# Altium PCB HU_revB.PcbDoc (part 3 of 5)
Units mm, origin at the board's own origin, x right, y up, seen from the top; angles counter-clockwise.
Board outline 164 x 90 mm, 6 copper layers (TOP, GND1, INT SIG, PWR + INT SIG, GND2, BOT), stack 1.538 mm thick; 404 components, 380 nets, 1687 pads, 342 vias.
Unrouted connection lines stored in the file: 70.
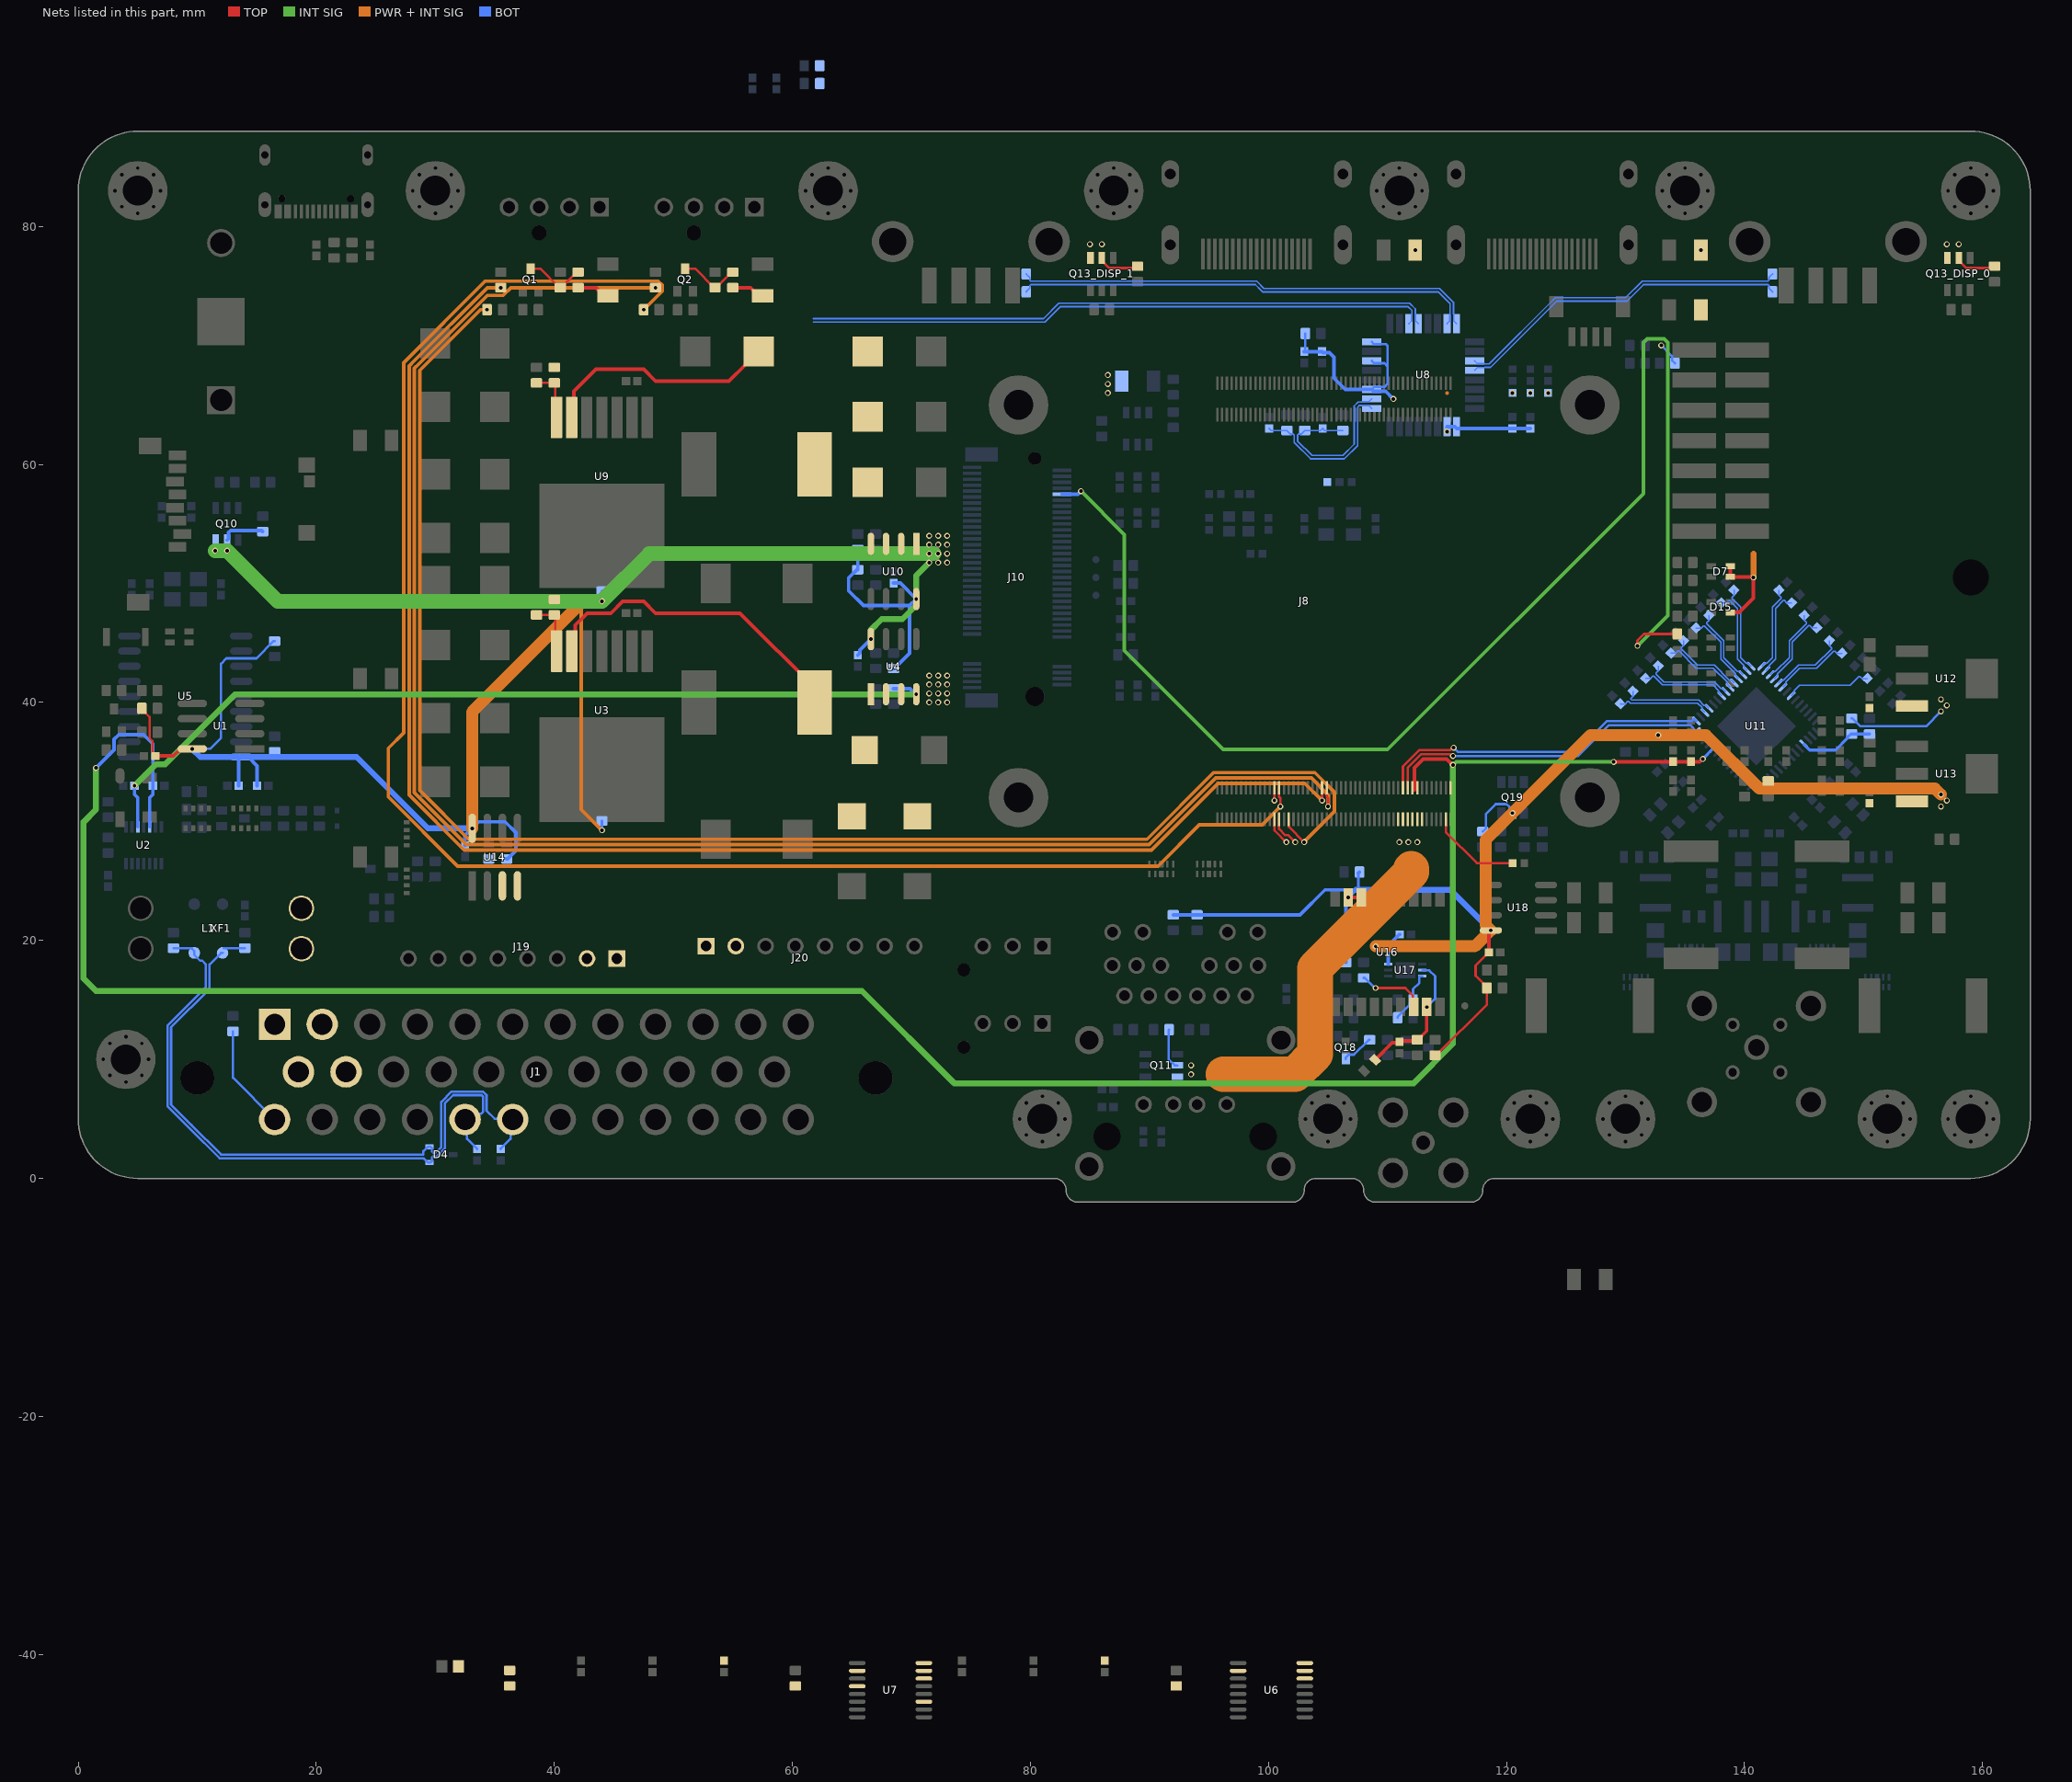
[diagram p6: the nets of this part, all layers, seen from the top]

## Via types
v1: diameter 0.5, hole 0.3, TOP to BOT, 322 vias
v2: diameter 0.5, hole 0.2, TOP to BOT, 16 vias
v3: diameter 0.75, hole 0.5, TOP to BOT, 4 vias

## Nets (pads, with @x,y where several pads share a name; then routed paths per layer and width w, separated by ;. In a path a pad name is that pad's centre, name@x,y a point inside that pad or via, vN(x,y) a via of type N, cw(c..) or ccw(c..) an arc to the next point about the centre after c; other vN are vias at no path point) (continued)
3V3_AUX: (continued)
  BOT w0.2: v1(9.584,36.095) 11.095,36.095 12,37 12,43.25 12.45,43.7 14.975,43.7 16.425,45.15 R54.1@16.5,45.15 ; v1(44,29.25) R28.1@44,30.05 ; v1(44,48.5) R84.1@44,49.35 ; C52.1@103,69.479 103.1,69.579 R137.2@103.1,71 ; 107.35,24.25 107.55,24.45 R27.2@107.55,25.65 ; U8.3@108.675,66.3 108.875,66.5 109.75,66.5 110,66.75 110,68.25 ; U8.6@108.675,68.7 108.875,68.5 109.75,68.5 110,68.25 ; U8.8@108.675,70.3 108.875,70.1 109.883,70.1 110,69.983 110,68.25 ; R131.1@118,29.15 118.275,29.425 118.275,30.629 119.096,31.45 120.004,31.45 120.25,31.204 120.25,30.95 v1(120.5,30.7) ; R96.2@131.5,37.15 131.6,37.25 v1(132.75,37.25) ; R97.2@149,38.65 149.075,38.65 149.725,38 155.25,38 v1(156.5,39.25)
  BOT w0.3: Q10.5@12.5,53.65 12.625,53.775 12.625,54.274 12.801,54.45 15.4,54.45 R59.2@15.5,54.35 ; C29.1@13.479,33 13.479,35.281 U5.18@13.617,35.42 ; U5.18@14.269,35.42 15.021,34.667 C30.1@15.021,33 ; C104.1@32.5,27.979 32.5,28.821 v1(33.095,29.416) 33.645,29.966 35.863,29.966 36.775,29.054 36.775,27.55 36.075,26.85 R108.2@36,26.85 ; C10.1@65.5,43.979 65.686,44.165 65.686,44.407 v1(66.595,45.316) ; R90.2@65.5,52.85 R89.2@65.5,51.15 65.425,51.15 64.725,50.45 64.725,49.384 65.975,48.134 69.855,48.134 ; R33.2@68.5,42.85 68.575,42.85 69.855,44.13 69.855,48.134 ; C60.1@68.5,50.021 69.067,50.021 v1(70.405,48.684) 69.855,48.134 ; R8.1@92,22.15 R9.1@94,22.15 102.65,22.15 104.75,24.25 107.35,24.25 v1(106.7,23.6) 106.7,23.546 106.521,23.367 C106.1@106.521,21.5 C107.1@106.521,20 106.511,19.989 106.511,18.161 R116.1@106.5,18.15 ; C52.1@103,69.479 C53.1@104.5,69.479 ; C53.1@104.5,69.457 104.568,69.39 105.11,69.39 105.5,69 105.5,67.25 106.45,66.3 U8.3@108.675,66.3 108.825,66.15 109.85,66.15 v1(110.5,65.5) ; R27.2@107.55,25.65 R27.2@107.65,25.75 ; v1(109,19.5) 110,19.5 110.075,19.575 ; U17.6@110.075,18 110.075,19.575 ; C109.1@111.021,20.5 111,20.5 110.075,19.575 ; v1(115,62.75) 115,63 U8.26@115,63.175 115.65,63.175 115.8,63.025 115.8,63.021 C55.1@120.5,63.021 C54.1@122,63.021
  BOT w0.5: v1(9.584,36.095) 10.259,35.42 U5.18@13.479,35.42 ; U5.18@13.7,35.42 14.269,35.42 23.38,35.42 29.384,29.416 v1(33.095,29.416) ; 107.35,24.25 115.279,24.25 v1(118.684,20.845)
  other v1: 156.5,31.25 157,31.75 157,39.75 156.5,40.25 72.25,51.75 73,51.75 72.25,52.5 73,52.5 71.5,53.25 72.25,53.25 73,53.25 71.5,54 72.25,54 73,54 86.5,66 120.5,66 122,66 123.5,66 86.5,66.75 86.5,67.5
3V3_EN: R85.2
3V3_MAIN: C4.1 C96.2 C97.2 J8.84 J8.86 U2.5 U11.24 | length 203.6
  TOP w0.3: 112.25,32.657 112.25,34.5 113,35.25 114.974,35.25 115.474,34.75 v1(115.5,34.75) ; v1(129,35) 129.011,35.011 133.989,35.011 C96.2@134,35.021 C97.2@135.5,35.021 136.232,35.021 136.46,35.25 v1(136.5,35.25)
  INT SIG w0.3: v1(115.5,34.75) 115.526,34.75 115.776,35 v1(129,35)
  INT SIG w0.5: v1(1.5,34.5) 1.5,31 0.45,29.95 0.45,16.8 1.5,15.75 65.85,15.75 73.6,8 112.2,8 115.5,11.3 v1(115.5,34.75)
  BOT w0.25: v1@136.5,35.268 U11.24@137.376,36.144
  BOT w0.3: v1(1.5,34.5) 3,36 3,36.889 3.411,37.3 5.5,37.3 6.271,36.529 C4.1@6.271,33 6.271,32.271 6,32 U2.5@6,29.543
3V3_REG_EN: R85.1 R86.2 U9.7 | length 4.5
  TOP w0.2: R86.2@38.5,66.85 R85.1@40,66.85 40.071,66.779 40.071,64.069 U9.7@40.19,63.95
3V3_REG_FB: C66.1 C67.1 C68.1 C69.1 L3.2 U9.6 U10.3 U10.4 | length 20
  TOP w0.3: U9.6@41.46,63.95 41.65,64.14 41.65,66.15 43.5,68 47.5,68 48.5,67 54.672,67 56.042,68.37 56.042,68.4 57.142,69.5 C68.1@57.172,69.5
5V_MAIN: C3.1 F1.2 F2.2 F4.2 F11_DISP_0.1 F11_DISP_1.1 J8.77 J8.79 J8.81 J8.83 J8.85 J8.87 Q11.5 Q11.6 Q13_DISP_0.5 Q13_DISP_0.6 Q13_DISP_1.5 Q13_DISP_1.6 R1.1 R2.1 R5.1 R34.2 R62.2 R65_DISP_0.2 R65_DISP_1.2 U2.3 U4.3 U4.4 | length 119.9
  TOP w0.2: Q13_DISP_1.5@86,77.35 86,77.125 86.625,76.5 88.85,76.5 R65_DISP_1.2@89,76.65 ; Q13_DISP_0.5@158,77.35 158,77.125 158.625,76.5 160.85,76.5 R65_DISP_0.2@161,76.65
  TOP w0.3: R2.1@42,74.85 43.5,74.85 44.18,74.17 F2.2@44.5,74.17 ; R5.1@55,74.85 56.5,74.85 57.18,74.17 F4.2@57.5,74.17
  INT SIG w0.5: v1(4.729,33) 6.529,34.8 7.3,34.8 13.184,40.684 v1(70.405,40.684)
  PWR + INT SIG w3: 96.216,8.75 102.226,8.75 103.915,10.439 103.915,17.665 112,25.75 112,26
  BOT w0.2: R62.2@91.65,12.5 91.6,12.45 91.6,10.025 92.125,9.5 Q11.5@92.35,9.5 ; v1(133,70) 133.905,69.095 133.905,68.745 R1.1@134.15,68.5
  BOT w0.3: v1(4.729,33) 4.729,32.271 5,32 U2.3@5,29.543 ; R34.2@68.5,41.15 69.885,41.15 70.351,40.684 v1(70.405,40.684)
  other v1: 93.5,8.75 93.5,9.5 111,28.25 111.75,28.25 112.5,28.25 71.5,40 72.25,40 73,40 71.5,40.75 72.25,40.75 73,40.75 71.5,41.5 72.25,41.5 73,41.5 71.5,42.25 72.25,42.25 73,42.25 112.33,78 136.33,78 85,78.5 86,78.5 157,78.5 158,78.5
5V_REG_EN: R29.1 R30.2 U3.7 | length 4.6
  TOP w0.2: R30.2@38.5,47.35 R29.1@40,47.35 40.071,47.279 40.071,44.419 U3.7@40.19,44.3
5V_REG_FB: C16.1 C17.1 C18.1 L2.2 U3.6 U4.1 U4.2 | length 27.6
  TOP w0.3: U3.6@41.46,44.3 41.75,44.59 41.75,46.5 42.75,47.5 44.75,47.5 45.75,48.5 47.5,48.5 48.5,47.5 55.6,47.5 62,41.1 L2.2@62,40
ACC_12V: J1.24 R22.1 | length 8.8
  BOT w0.2: R22.1@13,12.35 13,8.45 J1.24@16.5,4.95
ACT_LED: J10.10 R44.2 | length 118.1
  TOP w0.2: v1(131,44.75) 131,45.2 131.55,45.75 R44.2@134.35,45.75
  INT SIG w0.3: v1(84.25,57.75) 87.9,54.1 87.9,44.35 96.2,36.05 110.004,36.05 131.5,57.546 131.5,70.228 131.822,70.55 133.228,70.55 133.55,70.228 133.55,47.3 v1(131,44.75)
  BOT w0.3: J10.10@82.65,57.5 83.974,57.5 84.224,57.75 v1(84.25,57.75)
ADC_MISO: J8.26 U6.15 U7.15 | length 1.1
  TOP w0.2: v1(100.5,31.75) J8.26@100.5,32.82
ADC_MOSI: J8.27 U6.14 U7.14 | length 2.6
  TOP w0.2: J8.27@100.9,30.18 100.9,29.35 101.412,28.838 101.662,28.838 v1(102.25,28.25)
ADC_SCLK: J8.25 U6.16 U7.16 | length 2.3
  TOP w0.2: J8.25@100.5,30.18 100.5,29.25 v1(101.5,28.25)
AMBIENT_TEMP: R57.2 R58.2 U7.11
AMP_I_SENSE: R107.1 U7.4
AMP_VCC: J19.1 J19.2 J20.1 J20.2 U14.3 U14.4
ANT_DETECT: R125.2 U16.16 | length 5.7
  TOP w0.2: v1(109,16) 111.5,16 112.142,15.358 112.142,14.458 U16.16@112.2,14.4
  BOT w0.2: R125.2@108,16.85 108.075,16.85 108.925,16 v1(109,16)
ANT_PWR_GATE: Q18.3 R117.2 | length 2.7
  BOT w0.2: Q18.3@106.5,10.05 106.5,10.15 106.75,10.4 107.175,10.4 108.425,11.65 R117.2@108.5,11.65
ANT_SENSE: R120.2 R121.1 U17.3 | length 4.5
  BOT w0.2: R120.2@110.85,13.5 110.85,13.575 111.85,14.575 111.85,14.7 R121.1@112.15,15 112.15,15.913 112.675,16.438 112.675,16.975 112.7,17 U17.3@112.925,17
ANT_SHORT_N: C108.1 L16.1 R119.2 U16.17 U17.2 | length 11.5
  TOP w0.261: R119.2@112.575,11.65 113.3,12.375 v1(113.3,14.4)
  TOP w0.3: L16.1@108.968,9.968 110.389,11.389 110.911,11.389 111.086,11.564 112.414,11.564 R119.2@112.5,11.65
  BOT w0.2: U17.2@112.925,17.5 112.941,17.484 113.516,17.484 114,17 114,15.1 v1(113.3,14.4)
BAT_12V: J1.1 J1.2 J1.13 J1.14 XF1.1 XF1.2
CAM_GPIO0: J8.97 R145.1 | length 7.8
  TOP w0.2: J8.97@114.9,30.18 114.9,29.1 117.5,26.5 R145.1@120.5,26.5
CAM_GPIO1: J8.100
CAN_INH: R29.2
CAN_N: C6.1 D4.2 J1.29 L1.4 R21.2 | length 56.6
  BOT w0.2: L1.4@12.125,18.95 11.993,18.95 11.026,17.983 11.026,15.938 7.802,12.714 7.802,6.198 9.5,4.5 12,2 29,2 29,2.29 29.36,2.65 D4.2@29.5,2.65 29.608,2.65 29.718,2.54 29.718,2.268 29.836,2.151 30.001,2.151 30.5,2.65 30.5,6.427 31.375,7.302 34.008,7.302 34.302,7.008 34.302,5.698 34.992,5.008 36.442,5.008 J1.29@36.5,4.95 36.325,4.775 36.325,3.325 35.5,2.5 C6.1@35.5,2.479 ; L1.4@12.21,19.35 R21.2@14,19.35
CAN_P: C8.2 D4.1 J1.28 L1.1 R24.1 | length 55.9
  BOT w0.2: R24.1@8,19.35 9.5,19.35 9.75,19.1 9.75,18.794 10.245,18.298 10.409,18.298 10.724,17.983 10.724,16.063 7.5,12.839 7.5,6.073 9.379,4.195 11.875,1.698 29,1.698 29.048,1.65 29.06,1.65 29.36,1.35 D4.1@29.5,1.35 29.608,1.35 29.718,1.46 29.718,1.732 29.836,1.849 30.126,1.849 30.802,2.525 30.802,6.302 31.5,7 33.883,7 34,6.883 34,5.582 33.836,5.419 32.969,5.419 J1.28@32.5,4.95 32.675,4.775 32.675,3.325 33.5,2.5 C8.2@33.5,2.479
CFG0: R97.1 R99.2 U11.4 | length 6.3
  BOT w0.25: U11.4@144.977,36.497 145.475,36 147.65,36 148.65,37 148.65,37.075 148.925,37.35 R97.1@149,37.35 R99.2@150.5,37.35
CH0_FAN_PWM: Q1.3 R2.2 R135.2 | length 5.2
  TOP w0.2: Q1.3@38,76.45 38.825,76.45 40.425,74.85 R135.2@40.5,74.85 40.575,74.85 41.575,75.85 41.7,75.85 R2.2@42,76.15
CH0_FAN_TACH: J8.46 R47.2 | length 129.1
  TOP w0.2: v1(104.5,31.75) J8.46@104.5,32.82
  PWR + INT SIG w0.3: v1(35.5,74.85) 34.377,74.85 28.2,68.673 27.8,68.273 27.8,32.637 27.8,32.227 32.427,27.6 32.837,27.6 90.168,27.6 95.768,33.2 103.05,33.2 v1(104.5,31.75)
CH0_GPIO: J8.31 R3.1 | length 132.3
  TOP w0.2: J8.31@101.7,30.18 101.7,29.55 v1(103,28.25)
  PWR + INT SIG w0.3: v1(34.35,73) 33.8,73 28.7,67.9 28.7,32.6 32.8,28.5 89.795,28.5 95.395,34.1 103.9,34.1 105.55,32.45 105.55,30.828 103,28.278 v1(103,28.25)
CH1_FAN_PWM: Q2.3 R5.2 R136.2 | length 5.2
  TOP w0.2: Q2.3@51,76.45 51.825,76.45 53.425,74.85 R136.2@53.5,74.85 53.575,74.85 54.575,75.85 54.7,75.85 R5.2@55,76.15
CH1_FAN_TACH: J8.48 R132.2 | length 142.8
  TOP w0.2: J8.48@104.9,32.82 104.9,32.057 105,31.957 v1(105,31.25)
  PWR + INT SIG w0.3: v1(48.5,74.85) 36.35,74.85 35.7,74.2 34.364,74.2 28.65,68.486 28.25,68.086 28.25,32.823 28.25,32.414 32.614,28.05 33.023,28.05 89.982,28.05 95.582,33.65 103.6,33.65 105.05,32.2 105.05,31.522 105.038,31.51 105.038,31.288 v1(105,31.25)
CH1_GPIO: J8.28 R6.1 | length 145.5
  TOP w0.2: J8.28@100.9,32.82 100.9,32.057 101,31.957 v1(101,31.25)
  PWR + INT SIG w0.3: v1(47.5,73) 49.05,74.55 49.05,75.078 48.728,75.4 36.7,75.4 34.2,75.4 27.35,68.55 27.35,37.45 26.05,36.15 26.05,32.068 31.868,26.25 90.727,26.25 94.191,29.714 99.464,29.714 v1(101,31.25)
CKA_N: C121.2 U11.40 | length 6.4
  BOT w0.103: C121.2@136.99,47.313 137.005,47.298 137.005,46.895 136.808,46.698 136.808,46.613 138.249,45.172 138.249,43.758 139.421,42.586 139.596,42.586 U11.40@139.851,42.331
CKA_P: C120.2 U11.39 | length 6.4
  BOT w0.103: C120.2@135.929,46.253 135.945,46.237 136.347,46.237 136.544,46.434 136.629,46.434 137.996,45.067 137.996,43.653 139.243,42.407 139.243,42.232 U11.39@139.497,41.977
CKB_N: C131.2 U11.46 | length 6.4
  BOT w0.103: U11.46@142.503,41.977 142.757,42.232 142.757,42.407 144.011,43.661 144.011,45.075 145.386,46.45 145.471,46.45 145.668,46.253 C131.2@146.071,46.253
CKB_P: C130.2 U11.45 | length 6.4
  BOT w0.103: U11.45@142.149,42.331 142.404,42.586 142.579,42.586 143.758,43.766 143.758,45.18 145.207,46.628 145.207,46.714 145.01,46.911 C130.2@145.01,47.313
CONF_SCL: J8.80 U11.29 | length 28.5
  TOP w0.2: J8.80@111.3,32.82 111.3,34.611 112.689,36 115.29,36 115.483,36.193 v1(115.557,36.193)
  BOT w0.2: v1(115.557,36.193) 115.9,35.85 125.855,35.85 128.447,38.442 135.572,38.442 135.751,38.62 135.77,38.62 U11.29@135.948,38.442
CONF_SDA: J8.82 U11.28 | length 27.8
  TOP w0.2: J8.82@111.7,32.82 111.7,34.516 112.834,35.65 115.271,35.65 115.42,35.501 v1(115.501,35.501)
  BOT w0.2: v1(115.501,35.501) 115.502,35.5 126,35.5 128.592,38.092 135.428,38.092 U11.28@135.962,37.558
D0_N: C47.2 R69.2 R71.1 U8.2 | length 15.2
  BOT w0.135: R69.2@106.25,62.85 104.721,62.85 C47.2@104.55,63.021 104.379,62.85 R71.1@103.05,62.85 102.745,62.545 102.522,62.545 102.443,62.466 102.443,61.967 103.66,60.75 106.25,60.75 107.2,61.7 107.2,64.914 107.529,65.243 107.838,65.243 107.863,65.268 108.443,65.268 U8.2@108.675,65.5
D0_P: C49.1 R74.1 U8.1 | length 13.9
  BOT w0.135: C49.1@100.05,63.021 100.221,62.85 R74.1@101.55,62.85 101.855,62.545 102.078,62.545 102.157,62.466 102.157,61.849 103.542,60.465 106.368,60.465 107.485,61.582 107.485,64.796 107.647,64.957 107.838,64.957 107.863,64.932 108.443,64.932 U8.1@108.675,64.7
D1_N: R73.2 U8.11 | length 52.2
  BOT w0.135: 61.75,71.965 81.215,71.965 82.5,73.25 111.751,73.25 112.057,72.944 112.057,72.892 112.057,72.662 112.032,72.637 112.032,72.057 U8.11@111.8,71.825
D1_P: R67.2 U8.12 | length 52.7
  BOT w0.135: 61.75,72.25 81.096,72.25 82.382,73.535 111.869,73.535 112.343,73.062 112.343,72.774 112.343,72.662 112.368,72.637 112.368,72.057 U8.12@112.6,71.825
D2_N: R79.2 U8.15 | length 38.4
  BOT w0.135: R79.2@79.65,74.5 79.955,74.805 79.955,75.028 80.034,75.107 98.893,75.107 99.333,74.667 99.5,74.5 114.257,74.5 115.257,73.5 115.257,72.971 115.257,72.662 115.232,72.637 115.232,72.057 U8.15@115,71.825
D2_P: R76.2 U8.16 | length 38.9
  BOT w0.135: R76.2@79.65,76 79.955,75.695 79.955,75.472 80.034,75.393 99.011,75.393 99.618,74.785 114.376,74.785 115.543,73.618 115.543,72.853 115.543,72.662 115.568,72.637 115.568,72.057 U8.16@115.8,71.825
D3_N: R83.2 U8.19 | length 28.4
  BOT w0.135: U8.19@117.325,68.7 117.557,68.468 118.137,68.468 118.162,68.443 118.539,68.443 123.929,73.833 124.096,74 130,74 131.393,75.393 141.966,75.393 142.045,75.472 142.045,75.695 R83.2@142.35,76
D3_P: R82.2 U8.20 | length 28.4
  BOT w0.135: U8.20@117.325,67.9 117.557,68.132 118.137,68.132 118.162,68.157 118.657,68.157 124.215,73.715 130.118,73.715 131.511,75.107 141.966,75.107 142.045,75.028 142.045,74.805 R82.2@142.35,74.5
DA0_N: C113.2 U11.32 | length 7.7
  BOT w0.103: C113.2@130.626,40.949 130.641,40.934 130.641,40.531 130.444,40.334 130.444,40.249 130.505,40.189 133.235,40.189 133.25,40.204 136.146,40.204 136.593,39.757 136.768,39.757 U11.32@137.023,39.503
DA0_P: C112.2 U11.31 | length 7.7
  BOT w0.103: C112.2@129.565,39.889 129.581,39.873 129.983,39.873 130.18,40.07 130.265,40.07 130.4,39.936 133.339,39.936 133.355,39.951 136.041,39.951 136.414,39.579 136.414,39.404 U11.31@136.669,39.149
DA1_N: C115.2 U11.36 | length 7.3
  BOT w0.103: C115.2@132.747,43.071 132.748,42.667 132.551,42.47 132.551,42.385 133.218,41.718 137.461,41.718 138.007,41.172 138.182,41.172 U11.36@138.437,40.917
DA1_P: C114.2 U11.35 | length 7.3
  BOT w0.103: C114.2@131.687,42.009 132.09,42.009 132.287,42.206 132.372,42.206 133.113,41.465 137.356,41.465 137.828,40.993 137.828,40.818 U11.35@138.083,40.563
DA2_N: C117.2 U11.38 | length 6.4
  BOT w0.103: C117.2@134.869,45.192 134.869,44.789 134.672,44.592 134.672,44.507 136.046,43.133 137.461,43.133 138.714,41.879 138.889,41.879 U11.38@139.144,41.624
DA2_P: C116.2 U11.37 | length 6.4
  BOT w0.103: C116.2@133.808,44.131 134.211,44.131 134.408,44.328 134.493,44.328 135.942,42.88 137.356,42.88 138.536,41.7 138.536,41.525 U11.37@138.79,41.27
DA3_N: C119.2 U11.42 | length 7.3
  BOT w0.103: C119.2@139.111,49.435 139.127,49.419 139.127,49.017 138.93,48.82 138.93,48.734 139.663,48.001 139.663,43.758 140.129,43.293 140.303,43.293 U11.42@140.558,43.038
DA3_P: C118.2 U11.41 | length 7.3
  BOT w0.103: C118.2@138.051,48.374 138.066,48.359 138.469,48.359 138.666,48.556 138.751,48.556 139.411,47.896 139.411,43.653 139.95,43.114 139.95,42.939 U11.41@140.205,42.685
DB0_N: C123.2 U11.44 | length 7.3
  BOT w0.103: U11.44@141.795,42.685 142.05,42.939 142.05,43.114 142.597,43.661 142.597,47.903 143.264,48.57 143.349,48.57 143.546,48.373 C123.2@143.949,48.374
DB0_P: C122.2 U11.43 | length 7.3
  BOT w0.103: U11.43@141.442,43.038 141.697,43.293 141.871,43.293 142.344,43.765 142.344,48.008 143.085,48.749 143.085,48.834 142.888,49.031 C122.2@142.889,49.435
DB1_N: C125.2 U11.48 | length 6.4
  BOT w0.103: U11.48@143.21,41.27 143.464,41.525 143.464,41.7 144.637,42.872 146.051,42.872 147.492,44.313 147.577,44.313 147.774,44.116 148.177,44.116 C125.2@148.192,44.131
DB1_P: C124.2 U11.47 | length 6.4
  BOT w0.103: U11.47@142.856,41.624 143.111,41.879 143.286,41.879 144.532,43.125 145.946,43.125 147.313,44.492 147.313,44.577 147.116,44.774 147.116,45.177 C124.2@147.131,45.192
DB2_N: C127.2 U11.50 | length 7.3
  BOT w0.103: U11.50@143.917,40.563 144.172,40.818 144.172,40.993 144.637,41.458 148.879,41.458 149.613,42.192 149.698,42.192 149.895,41.995 150.298,41.995 C127.2@150.313,42.01